# Altium PCB PCB1.PcbDoc
Units mm, origin at the board's own origin, x right, y up, seen from the top; angles counter-clockwise.
Board outline 65 x 60 mm, 2 copper layers (Top Layer, Bottom Layer); 30 components, 19 nets, 93 pads, 4 vias.
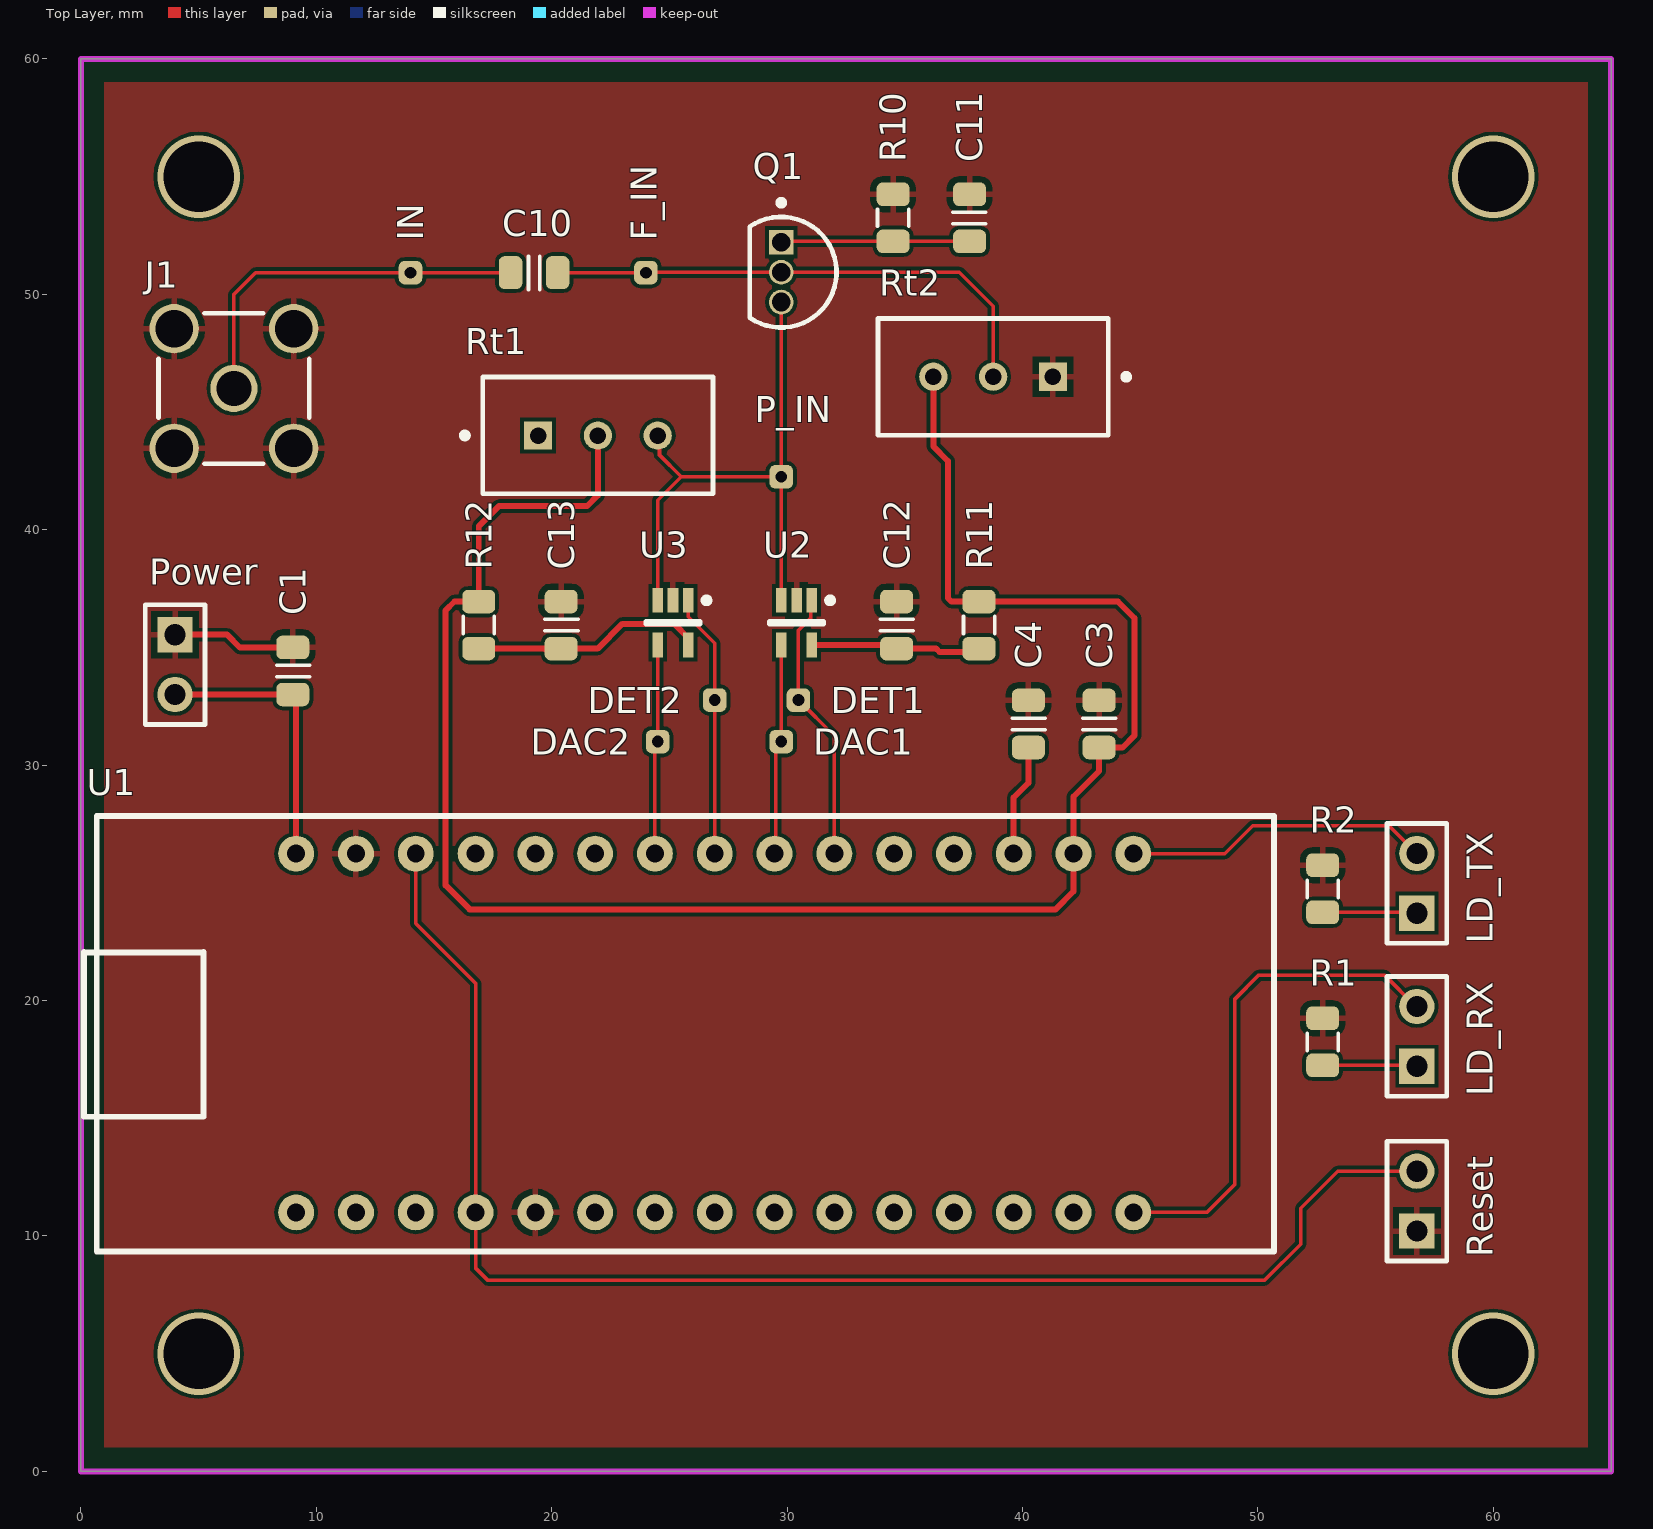
[diagram p0: Top Layer view]
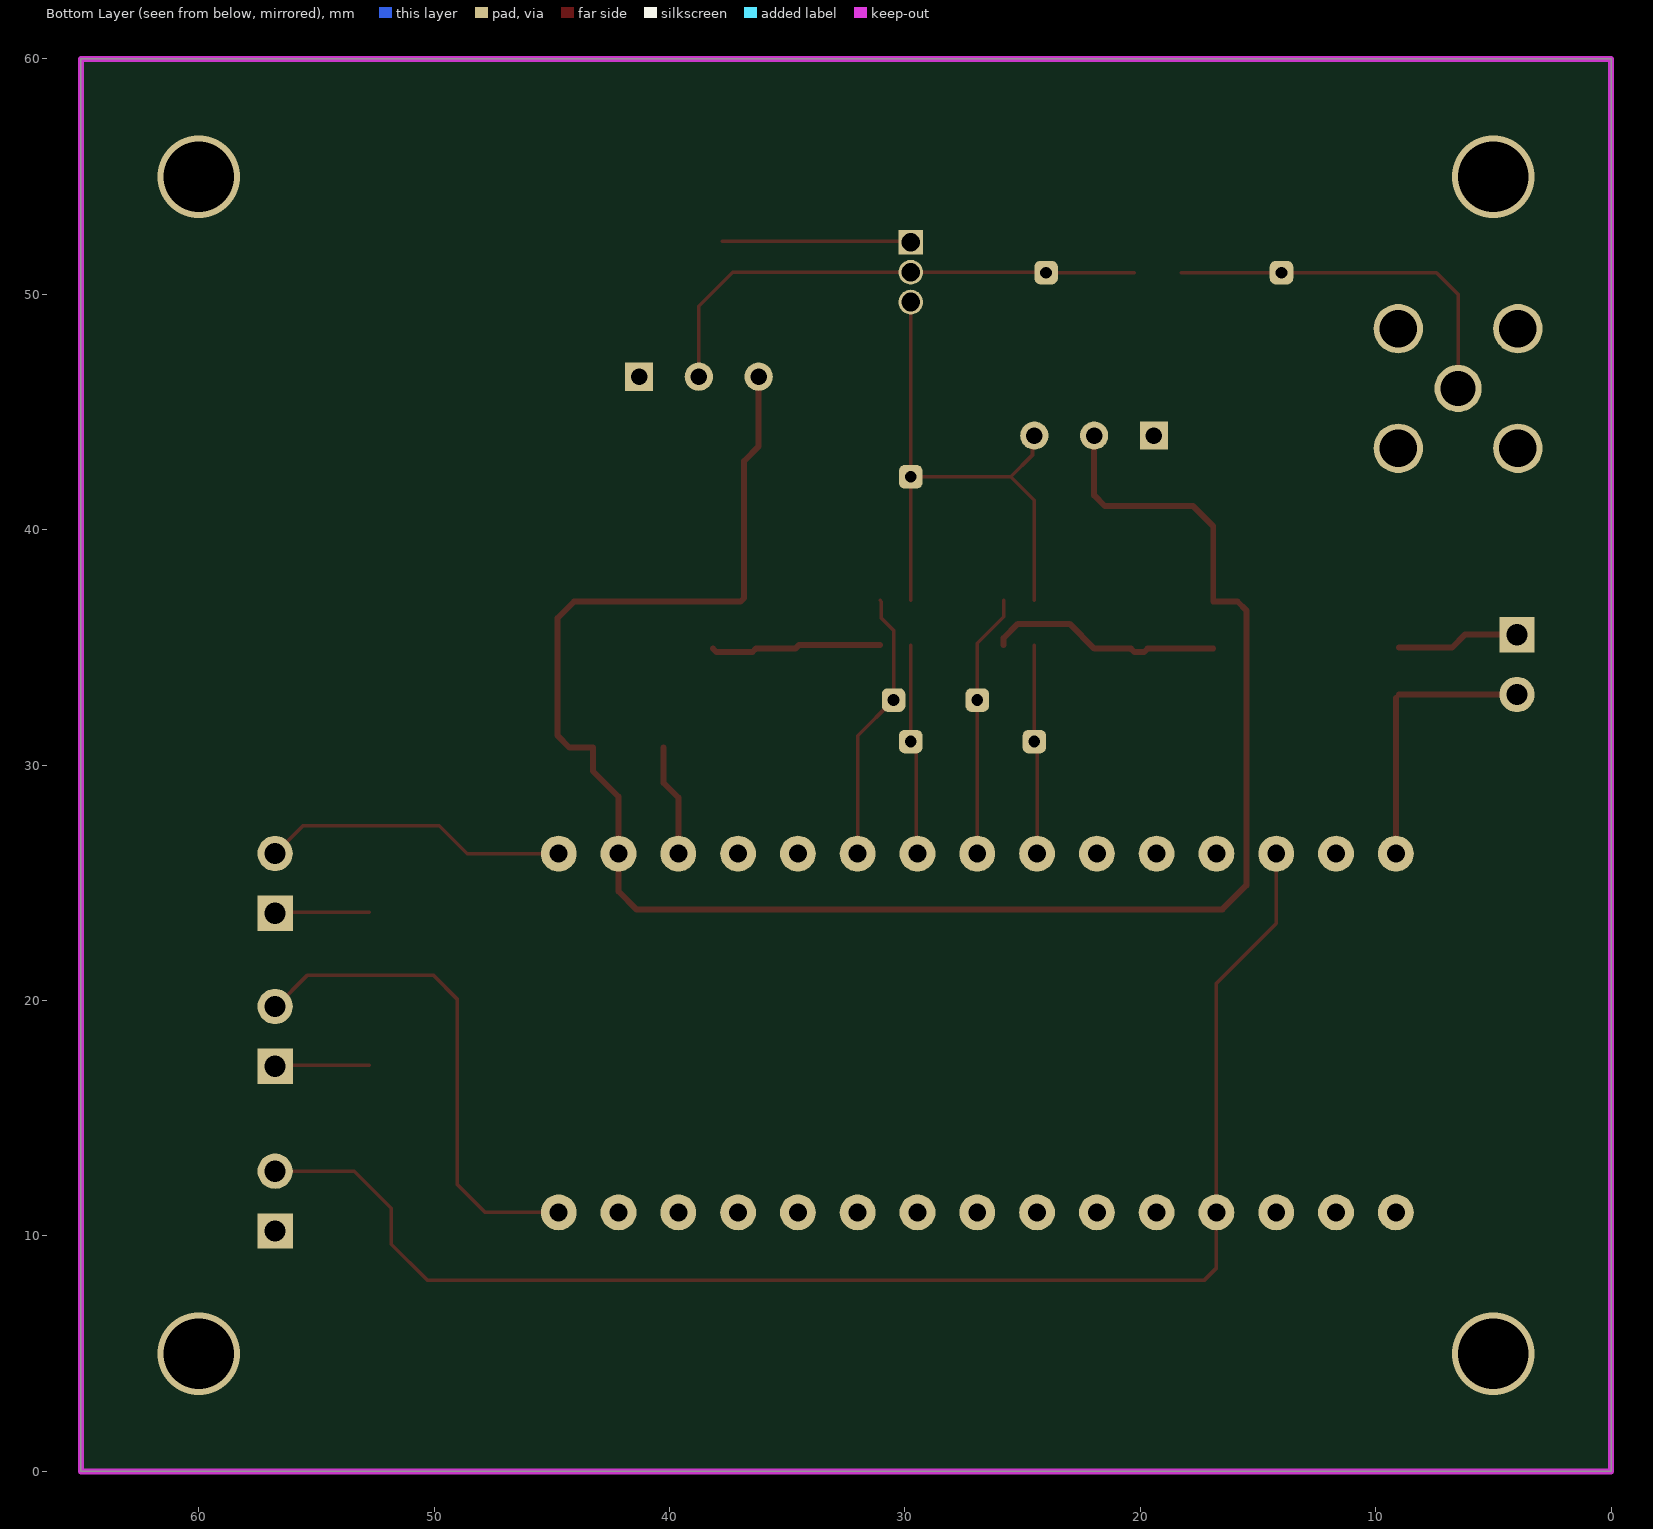
[diagram p1: Bottom Layer view, seen from below]

## Layer stack, top to bottom
Top Solder: solder mask 0.0102, Solder Resist, Dk 3.5
Top Layer: signal copper 0.0356
Dielectric 1: dielectric 0.32, FR-4, Dk 4.8
Bottom Layer: signal copper 0.0356
Bottom Solder: solder mask 0.0102, Solder Resist, Dk 3.5

## Board outline
0,0 65,0 65,60 0,60

## Design rules (kind name [scope] priority, off if disabled: settings)
Clearance [All] p1: gap=0.152 ignorepadtopadclearanceinfootprint=FALSE
PolygonConnect [All] p1: connectstyle=Relief reliefconductorwidth=0.254 reliefentries=4 polygonreliefangle="90 Angle" airgapwidth=0.254
RoutingVias [All] p1: holewidth=0.4 width=0.6 viastyle="Through Hole" minholewidth=0.4 minwidth=0.6 maxholewidth=0.4 maxwidth=0.6
SolderMaskExpansion [All] p1: expansion=0.102 istentingtop=FALSE
Width [All] p1: maxlimit=0.254 minlimit=0.152 preferedwidth=0.152
30 further rules are at their usual default settings.

## Classes and differential pairs
component class Input: C10 C11 C12 C13 DET1 DET2 F_IN IN J1 P_IN Q1 R10 R11 R12 Rt1 Rt2 U2 U3
component class Control: C1 C3 C4 DAC1 DAC2 LD_RX LD_TX Power R1 R2 Reset U1

## Components (designator, comment, footprint, x,y, rotation, side; value= is the part's Value field where it differs from the comment)
C1 "10uF 16V" 0805_C 9,33 r90 top
C3 "10uF 16V" 0805_C 43.25,30.75 r90 top
C4 "10uF 16V" 0805_C 40.25,30.75 r90 top
C10 "10uF 16V" 0805_C 18.25,50.92 r0 top
C11 "1uF 16V" 0805_C 37.75,54.25 r270 top
C12 "1uF 16V" 0805_C 34.65,34.95 r90 top
C13 "1uF 16V" 0805_C 20.4,34.95 r90 top
DAC1 "Point" Test_Point 29.75,31 r90 top
DAC2 "Point" Test_Point 24.5,31 r90 top
DET1 "Point" Test_Point 30.48,32.766 r90 top
DET2 "Point" Test_Point 26.924,32.766 r90 top
F_IN "Point" Test_Point 24,50.92 r90 top
IN "Point" Test_Point 14,50.92 r0 top
J1 "5-1814832-1" TECO-5-1814832-1_V 6.5,46 r0 top
LD_RX "UART_RX" HDR1X2 56.75,17.21 r90 top
LD_TX "UART_TX" HDR1X2 56.75,23.71 r90 top
P_IN "Point" Test_Point 29.75,42.25 r90 top
Power "Pow In" HDR1X2 4,35.54 r270 top
Q1 "2N3904" ONSC-TO-92-3-29-11 29.75,50.94 r270 top
R1 "600R" 0805_R 52.75,19.25 r270 top
R2 "600R" 0805_R 52.75,25.75 r270 top
R10 "100R" 0805_R 34.5,52.25 r90 top
R11 "22R" 0805_R 38.15,34.95 r90 top
R12 "22R" 0805_R 16.9,34.95 r90 top
Reset "Reset" HDR1X2 56.75,10.21 r90 top
Rt1 "3296W-1-503LF" FP-3296W-MFG 21.96,44.005 r180 top value=500kΩ
Rt2 "3296W-1-503LF" FP-3296W-MFG 38.75,46.495 r0 top value=500kΩ
U1 "Stm32F303K8-Nucleo board" F303-Nucleo 9.144,11 r90 top
U2 "MCP6001T-I/LT" SC70-LT5_M 30.4,36.05 r270 top
U3 "MCP6001T-I/LT" SC70-LT5_M 25.15,36.05 r270 top

## Footprints (in the part's own frame and the unit in brackets; to place one, negate y for a bottom-side part, rotate by r counter-clockwise, add the part's x,y. Pads: shape width x height; smd on the part's side, far side on the other; paste and mask are expansions set on the pad)
0805_C [mm]
  rrect50% 1x1.4 smd: 1(0,0) 2(2,0)
  Top Layer region: 0.024,0.339 0.024,0.339 0.024,0.339 0.024,0.339
  Top Layer region: 0.024,0.339 0.024,0.339 0.024,0.339 0.024,0.339
  silkscreen extent 0.76,-0.71 1.24,0.69
0805_R [mm]
  rrect50% 1x1.4 smd: 1(0,0) 2(2,0)
  Top Layer region: 0.024,0.339 0.024,0.339 0.024,0.339 0.024,0.339
  Top Layer region: 0.024,0.339 0.024,0.339 0.024,0.339 0.024,0.339
  silkscreen extent 0.63,-0.66 1.37,0.66
F303-Nucleo [mil]
  round 60 hole 30: 1(0,0) 2(0,-100) 3(0,-200) 4(0,-300) 5(0,-400) 6(0,-500) 7(0,-600) 8(0,-700) 9(0,-800) 10(0,-900) 11(0,-1000) 12(0,-1100) 13(0,-1200) 14(0,-1300) 15(0,-1400) 16(600,-1400) 17(600,-1300) 18(600,-1200) 19(600,-1100) 20(600,-1000) 21(600,-900) 22(600,-800) 23(600,-700) 24(600,-600) 25(600,-500) 26(600,-400) 27(600,-300) 28(600,-200) 29(600,-100) 30(600,0)
  silkscreen extent -65,-1635 663,355
FP-3296W-MFG [mm]
  rect 1.2x1.2 hole 0.7 paste-1000 mask+0: 1(2.54,0.005)
  round 1.2 hole 0.7 paste-1000 mask+0: 2(0,0.005) 3(-2.54,0.005)
  silkscreen extent -4.89,-2.48 5.77,2.48, body extent -4.99,-2.58 4.99,2.58, height 0.25
HDR1X2 [mm] "Connector; Header; 2 Position"
  rect 1.5x1.5 hole 0.9: 1(0,0)
  round 1.5 hole 0.9: 2(2.54,0)
  silkscreen extent -1.27,-1.27 3.81,1.27
ONSC-TO-92-3-29-11 [mm] "TO, 3-Leads, Body Dia 4.7mm, Pitch 1.27mm"
  rect 1.05x1.05 hole 0.8: 1(-1.27,0)
  round 1.05 hole 0.8: 2(0,0) 3(1.27,0)
  silkscreen extent -3.07,-1.34 2.35,2.35, body extent -2.35,-1.33 2.36,2.36, height 7.87
SC70-LT5_M [mm] "SOT353, 5-Leads, Body 2x1.3mm, Pitch 0.65mm, Lead Span 2.1mm, IPC Low Density"
  rect 1.05x0.45 smd: 1(-0.95,0.65) 2(-0.95,0) 3(-0.95,-0.65) 4(0.95,-0.65) 5(0.95,0.65)
  silkscreen extent -1.07,-1.15 0.05,1.55, body extent -0.67,-1.12 0.68,1.13, height 1.1
TECO-5-1814832-1_V [mm] "THD, 5-Leads, Body 6.4x6.4mm, Pitch 5.08mm"
  round 2 hole 1.5: 1(0,0)
  round 2.1 hole 1.6: 2(-2.54,2.54) 3(-2.54,-2.54) 4(2.54,-2.54) 5(2.54,2.54)
  silkscreen extent -3.2,-3.2 3.2,3.2, body extent -3.21,-3.21 3.19,3.19, height 9.5
Test_Point [mm]
  rrect50% 1x1 hole 0.5: 1(0,0)

## Part data
C1 C3 C4 C10 C11 C12 C13: library part Cap
J1: library part CMP-2000-05415-1, "SMA Connector, Pitch 5.08 mm, 1 Position, Height 9.5 mm, Tail Length 4 mm, -65 to 165 degC, RoHS, Bulk", Frequency Max=3GHz, Manufacturer="TE Connectivity", Package Description="SMA Connector, Pitch 5.08 mm, 1 Position, Height 9.5 mm, Tail Length 4 mm", Coaxial Cable Types=-, Coaxial Termination=Solder, Connector Body Style=StraightJack, Connector Mounting=PCBMount, Connector Type=SMACoaxial, Contact Material=BerylliumCopper, Contact Plating=GoldPlatedContacts, Datasheet URL=http://www.onlinecomponents.com/productFiles/mf-AMP/eng_cd_1814832_a.pdf, Datasheet Version="Rev. B1, 03/2011", Impedance=50ohm, Manufacturer URL=http://www.te.com/, Package Reference=5-1814832-1, Product Range=ZDCSeries, SVHC=NoSVHC(15-Jun-2015)
LD_RX LD_TX Power Reset: library part "Header 2", "Header, 2-Pin", LatestRevisionDate=17-Jul-2002, LatestRevisionNote="Re-released for DXP Platform.", Publisher="Altium Limited"
Q1: library part CMP-2000-05562-1, "General Purpose Transistor, NPN Silicon, 200 mA, 60 V, -55 to 150 degC, 3-Pin TO-92, RoHS, Bulk", Collector- Base Voltage VCBO=60V, Collector- Emitter Voltage VCEO Max=40V, Collector-Emitter Saturation Voltage=0.3V, Emitter- Base Voltage VEBO=6V, Manufacturer=ONSemiconductor, Maximum DC Collector Current=0.2A, Maximum Operating Temperature=+150C, Maximum Power Dissipation=625mW, Minimum Operating Temperature=-65C, Package / Case=TO-92-3(TO-226), Package Description="3-Pin Transistor Outline, Body 4.825 x 3.685 mm, Pitch 1.27 mm", Package Reference=TO-92-3-29-11, Brand=ONSemiconductor, Configuration=Single, Datasheet URL=https://datasheet.ciiva.com/4725/2n3903-d-285841-4725808.pdf, Datasheet Version="Rev. 8, 08/2012", DC Collector/Base Gain hfe Min=60, Factory Pack Quantity=5000, Gain Bandwidth Product fT=270MHz, Manufacturer URL=http://www.onsemi.com/, Mounting Style=ThroughHole, Mounting Technology=ThroughHole, Packaging=Bulk, Product Category=BipolarTransistors-BJT, RoHS=Details, Transistor Polarity=NPN
R1 R2 R10 R11 R12: library part Res
Rt1 Rt2: library part CMP-2000-05583-2, "TRIMMER 50K OHM 0.5W PC PIN TOP", Manufacturer=Bourns, Manufacturer Part Number=3296W-1-504LF, Package=3296W, Power Rating=0.5W, Resistance=500kΩ, Temperature="-55°C to +125°C", Temperature Coefficient=100ppm/°C, Temperature Range High=+125°C, Temperature Range Low=-55°C, Tolerance=10%, Voltage Rating=300V, Automotive=No, Category=Res, ComponentLink2Description=Datasheet, ComponentLink2URL=https://www.bourns.com/docs/Product-Datasheets/3296.pdf, Device Class L1="Passive Components", Device Class L2=Resistors, Device Class L3="Variable Resistors and Potentiometers", Digikey Description="TRIMMER 500K OHM 0.5W PC PIN TOP", Height=12.05mm, Lead Free=Yes, Mouser Description="Trimmer; Cermet; Rest 500 Kilohms; PCB; 25 Turns; Pwr-Rtg 0.5W", Octopart=https://octopart.com/3296w-1-504lf-bourns-143884, RoHS=TRUE, Series="Trimpot 3296-Sealed", Standoff Height=0.38mm
U1: library part F303-Nucleo
U2 U3: library part CMP-0187-00457-2, "1 MHz, Low-Power Operational Amplifier, 5-Pin SC-70, Industrial Temperature, Tape and Reel", Code_IPC=SOT353-5, ComponentLink1Description="Manufacturer URL", ComponentLink1URL=http://www.microchip.com/, ComponentLink2Description=Datasheet, ComponentLink2URL=http://ww1.microchip.com/downloads/en/DeviceDoc/21733j.pdf, ComponentLink3Description="Package Specification", ComponentLink3URL=http://www.microchip.com/stellent/groups/techpub_sg/documents/packagingspec/en012702.pdf, DatasheetVersion="revJ, Nov-2009", PackageDescription="5-Lead Plastic Small Outline Transistor (LT) [SC70]", PackageReference=SC70-LT5, PackageVersion="revBB, Aug-2009", RevisionNote="URLs added."

## Via types
v1: diameter 3.5, hole 3, Top Layer to Bottom Layer, 4 vias

## Nets (pads, with @x,y where several pads share a name; then routed paths per layer and width w, separated by ;. In a path a pad name is that pad's centre, name@x,y a point inside that pad or via, vN(x,y) a via of type N, cw(c..) or ccw(c..) an arc to the next point about the centre after c; other vN are vias at no path point)
+3.3: C3.1 R11.2 R12.2 Rt1.2 Rt2.3 U1.17 | length 83.2
  Top Layer w0.254: Rt1.2 21.96,41.46 21.5,41 17.75,41 16.9,40.15 R12.2 15.868,36.95 15.494,36.576 15.494,24.892 16.51,23.876 41.402,23.876 42.164,24.638 U1.17 42.164,28.664 43.25,29.75 C3.1 44.25,30.75 44.75,31.25 44.75,36.25 44.05,36.95 36.979,36.95 36.83,37.099 36.83,42.92 36.21,43.54 Rt2.3
DAC1_Out: DAC1.1 U1.22 U2.4 | length 9
  Top Layer w0.152: U1.22 29.52,26.296 29.52,30.77 DAC1.1 U2.4
DAC2_Out: DAC2.1 U1.24 U3.4 | length 8.9
  Top Layer w0.152: U1.24 24.384,30.884 DAC2.1 U3.4
DET1_Out: DET1.1 U1.21 U2.1 | length 11.8
  Top Layer w0.152: DET1.1@30.574,32.86 DET1.1 ; U2.1 30.997,36.947 30.997,36.247 30.48,35.73 DET1.1 ; U1.21 32.004,29.21 32.004,31.242 DET1.1
DET2_Out: DET2.1 U1.23 U3.1 | length 11.2
  Top Layer w0.152: U3.1 25.8,36.303 26.924,35.179 26.924,29.464 U1.23
GND: C1.2 C3.2 C4.2 C11.1 C12.2 C13.2 J1.2 J1.3 J1.4 J1.5 Power.1 R1.1 R2.1 R10.2 Reset.1 Rt2.1 U1.5 U1.29 U2.2 U3.2 | length 5.2
  Top Layer w0.254: Power.1 6.21,35.54 6.75,35 C1.2
NetC4_1: C4.1 U1.18 | length 4.8
  Top Layer w0.254: U1.18 39.624,28.624 40.25,29.25 C4.1
NetC10_1: C10.1 IN.1 J1.1 | length 16.1
  Top Layer w0.152: J1.1 6.5,50 7.42,50.92 IN.1 C10.1
NetC10_2: C10.2 F_IN.1 Q1.2 Rt2.2 | length 22.1
  Top Layer w0.152: C10.2 F_IN.1 24.02,50.94 Q1.2 37.31,50.94 38.75,49.5 Rt2.2
NetC11_2: C11.2 Q1.1 R10.1 | length 8
  Top Layer w0.152: Q1.1 29.79,52.25 R10.1 C11.2
NetC12_1: C12.1 R11.1 U2.5 | length 7.3
  Top Layer w0.254: U2.5 34.5,35.1 C12.1 36.327,34.95 36.473,34.804 38.004,34.804 R11.1
NetC13_1: C13.1 R12.1 U3.5 | length 10
  Top Layer w0.254: R12.1 19.69,34.95 19.836,34.804 20.254,34.804 C13.1 21.95,34.95 23,36 25.2,36 25.8,35.4 U3.5
NetLD_RX_1: LD_RX.1 R1.2 | length 4
  Top Layer w0.152: R1.2 56.71,17.25 LD_RX.1
NetLD_TX_1: LD_TX.1 R2.2 | length 4
  Top Layer w0.152: R2.2 56.71,23.75 LD_TX.1
NetP_IN_1: P_IN.1 Q1.3 Rt1.3 U2.3 U3.3 | length 24.7
  Top Layer w0.152: U3.3 24.5,41.25 25.5,42.25 ; Rt1.3 24.578,43.922 24.578,43.172 25.5,42.25 ; U2.3 P_IN.1 ; Q1.3 P_IN.1 ; 25.5,42.25 P_IN.1
NetReset_2: Reset.2 U1.4 U1.28 | length 61.7
  Top Layer w0.152: U1.28 14.224,23.276 16.764,20.736 U1.4 16.764,8.636 17.272,8.128 50.292,8.128 51.816,9.652 51.816,11.176 53.39,12.75 Reset.2
UART_RX: LD_RX.2 U1.15 | length 21.4
  Top Layer w0.152: U1.15 47.83,11 49.022,12.192 49.022,20.066 50.038,21.082 55.372,21.082 56.704,19.75 LD_RX.2
UART_TX: LD_TX.2 U1.16 | length 13
  Top Layer w0.152: U1.16 48.592,26.24 49.784,27.432 55.568,27.432 LD_TX.2
VIN: C1.1 Power.2 U1.30 | length 11.8
  Top Layer w0.152: C1.1 C1.1@9.144,32.856
  Top Layer w0.254: Power.2 C1.1 ; U1.30 C1.1@9.144,32.856
pads on no net: Rt1.1 U1.1 U1.2 U1.3 U1.6 U1.7 U1.8 U1.9 U1.10 U1.11 U1.12 U1.13 U1.14 U1.19 U1.20 U1.25 U1.26 U1.27
copper on no net:
  other v1: 5,5 60,5 5,55 60,55

## Polygon pours and split planes (outlines as drawn)
GND on Top Layer "GND_L01_P000" (solid, pour order 0): 1,59 1,1.016 64,1.016 64,59

## Keep-outs
Keep-Out Layer:
  the board outline again, w0.254